# Altium PCB LT3083.PcbDoc
Units mil, origin at the board's own origin, x right, y up, seen from the top; angles counter-clockwise.
Board outline 1898 x 1203 mil, 2 copper layers (Top Layer, Bottom Layer); 28 components, 13 nets, 76 pads, 96 vias.
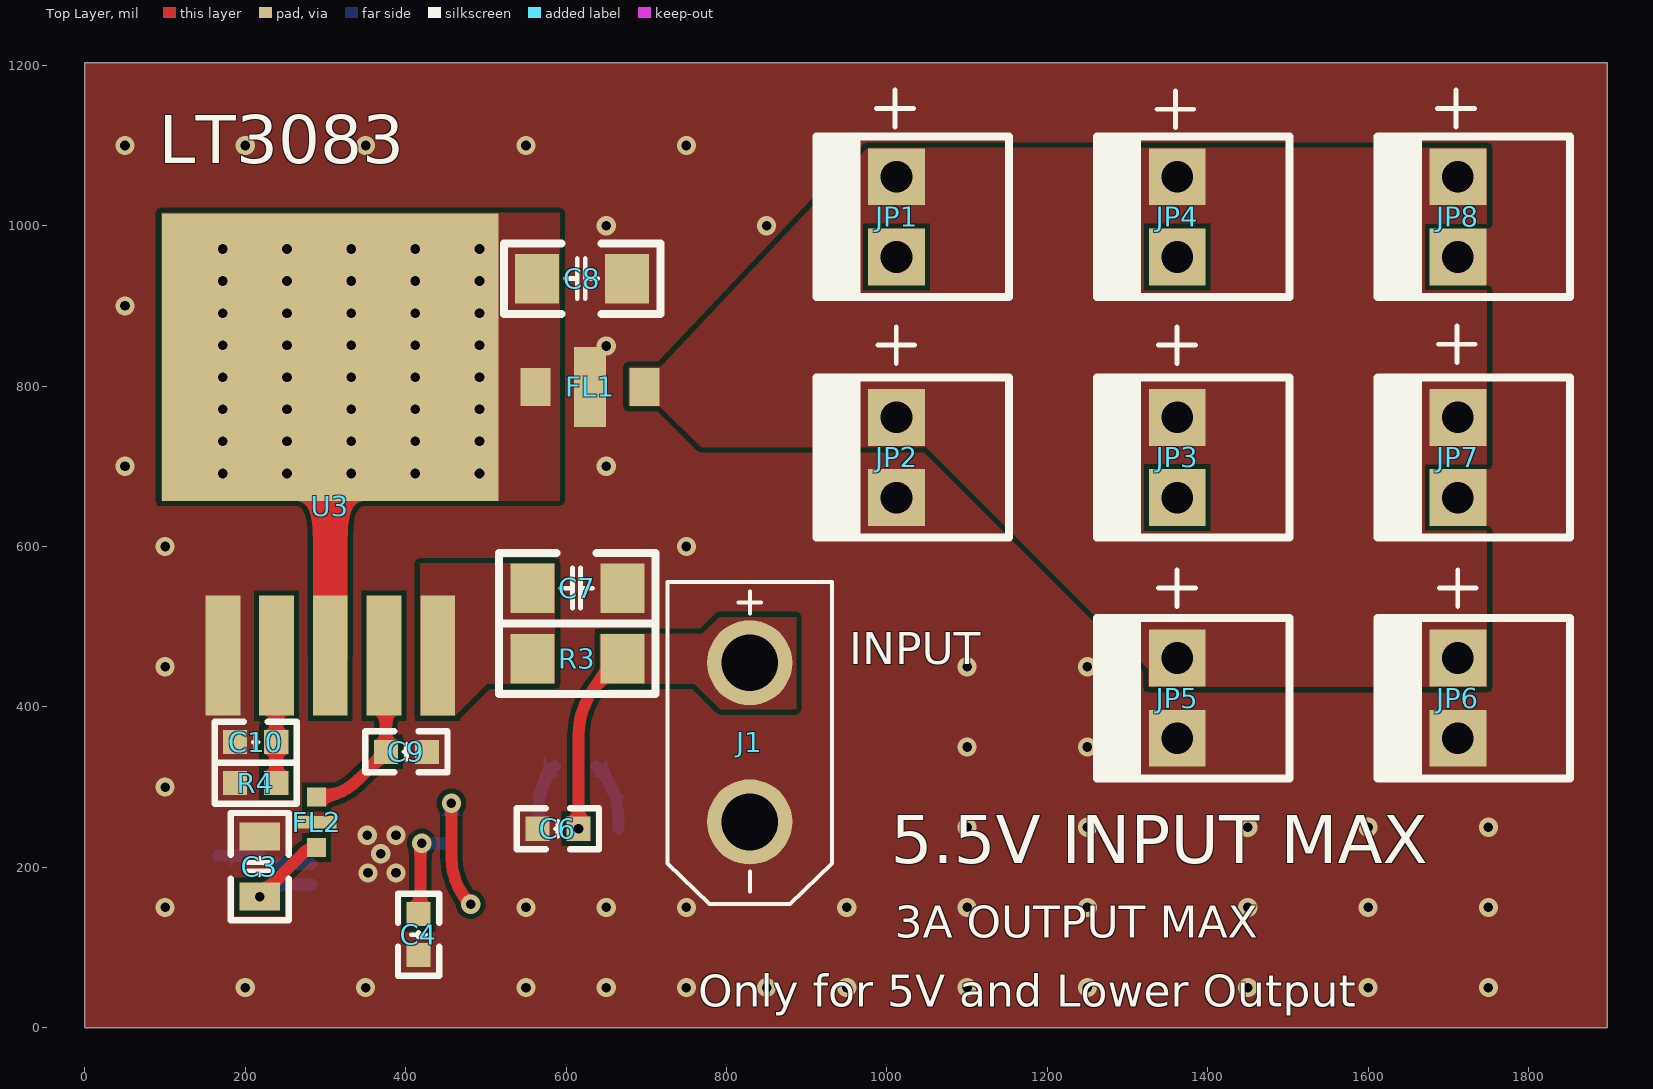
[diagram p0: Top Layer view]
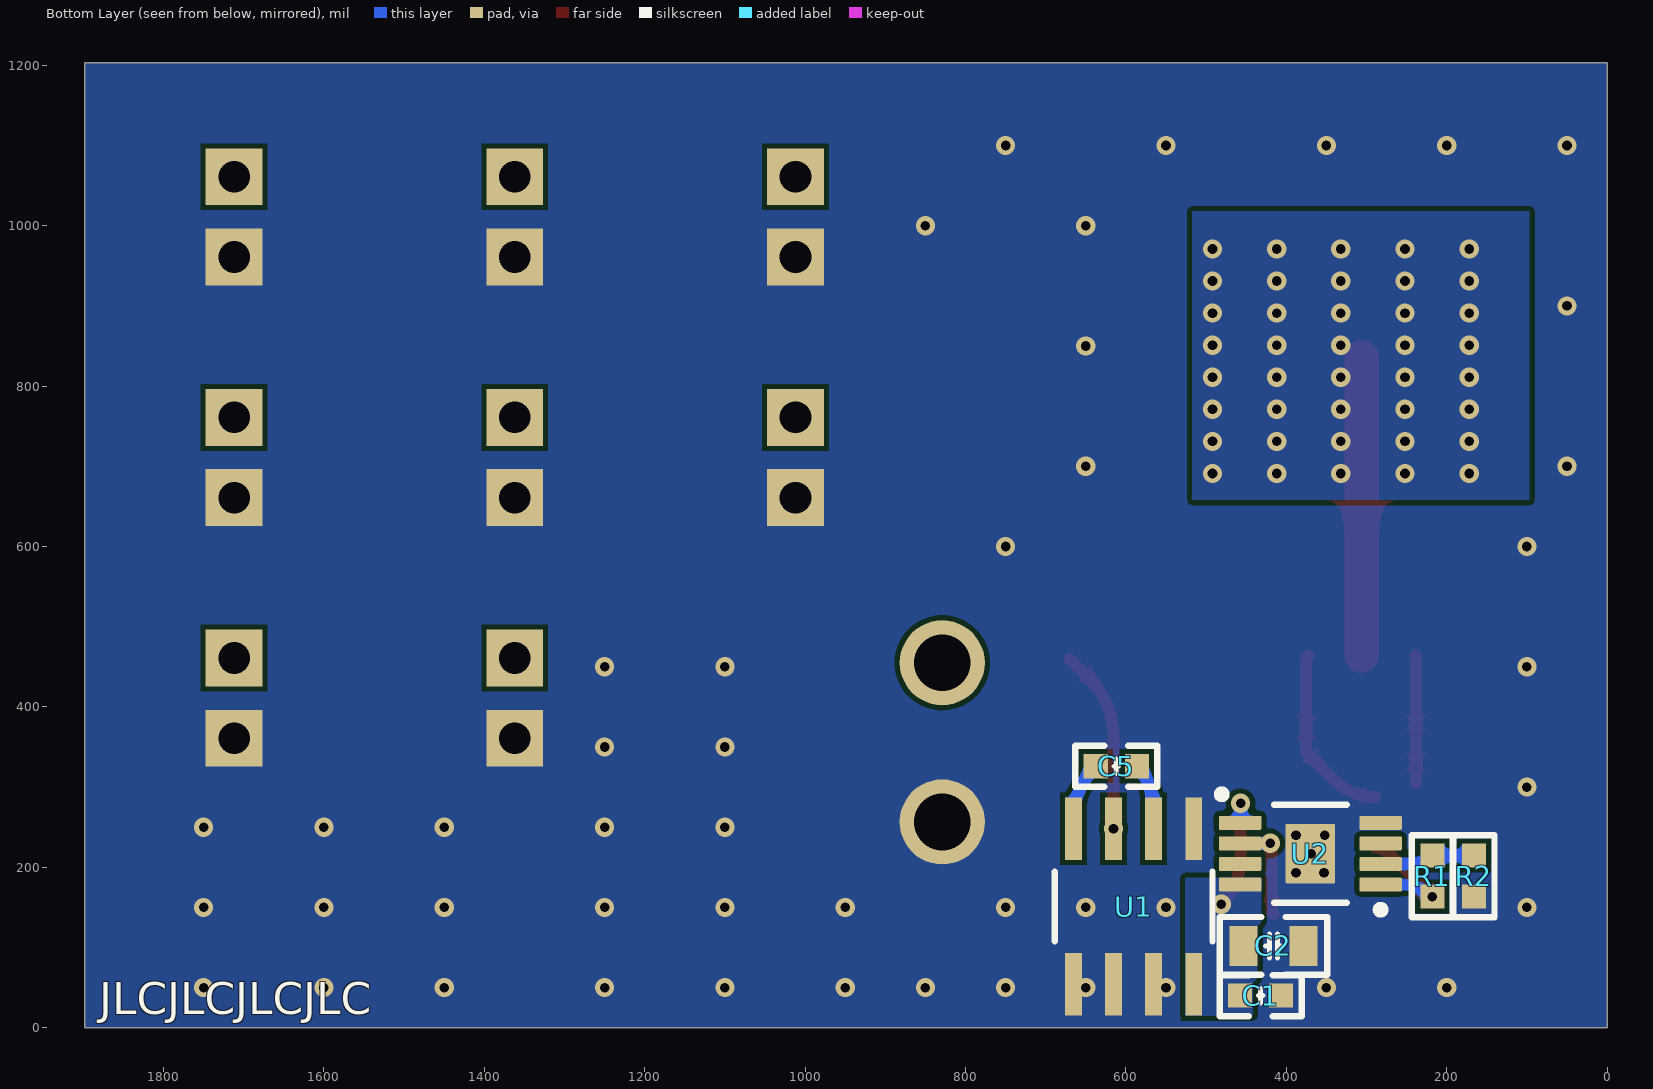
[diagram p1: Bottom Layer view, seen from below]
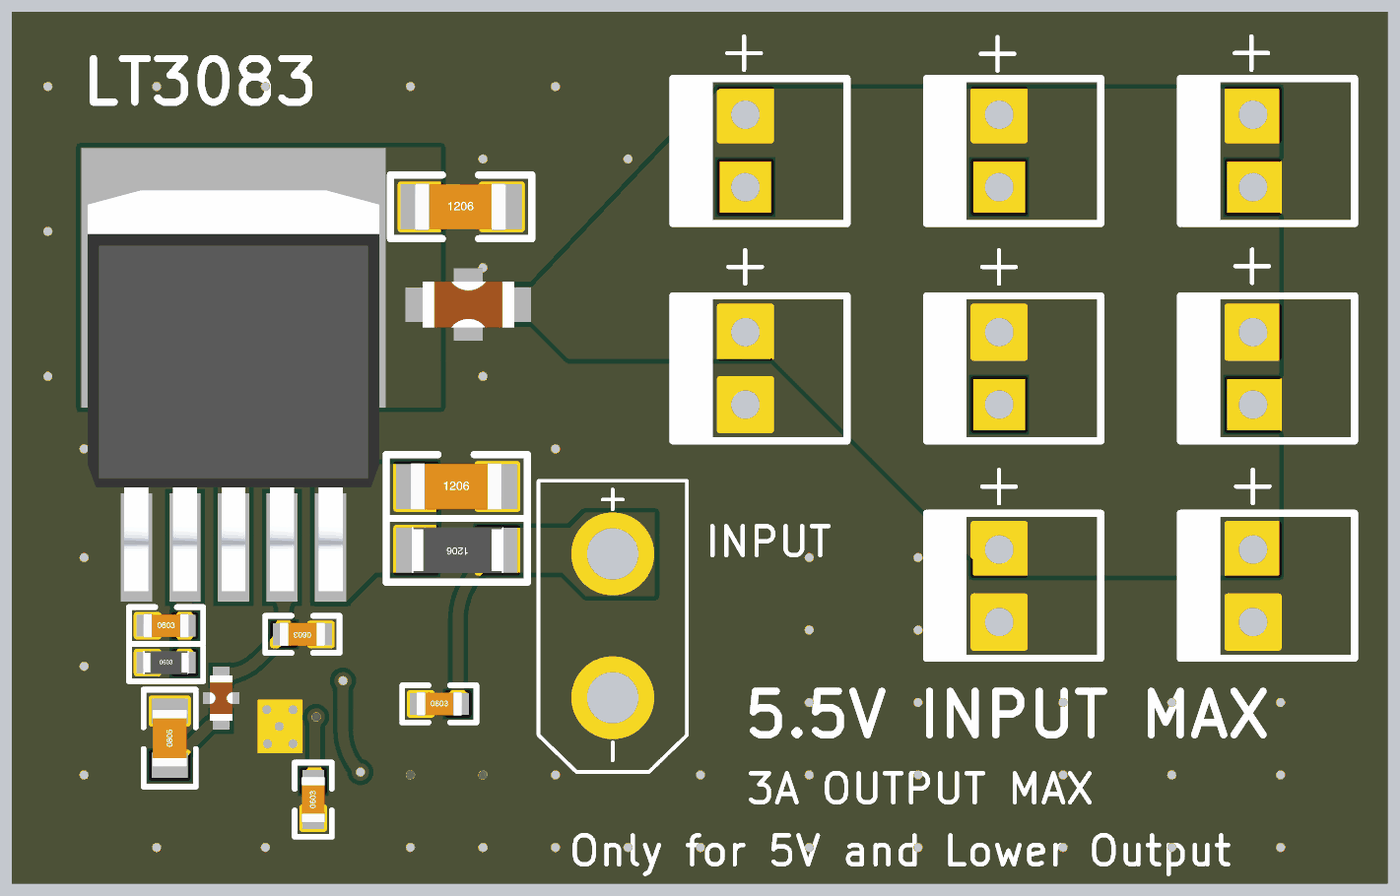
[diagram p2: 3D render of the assembled board from above, using the file's embedded part models]
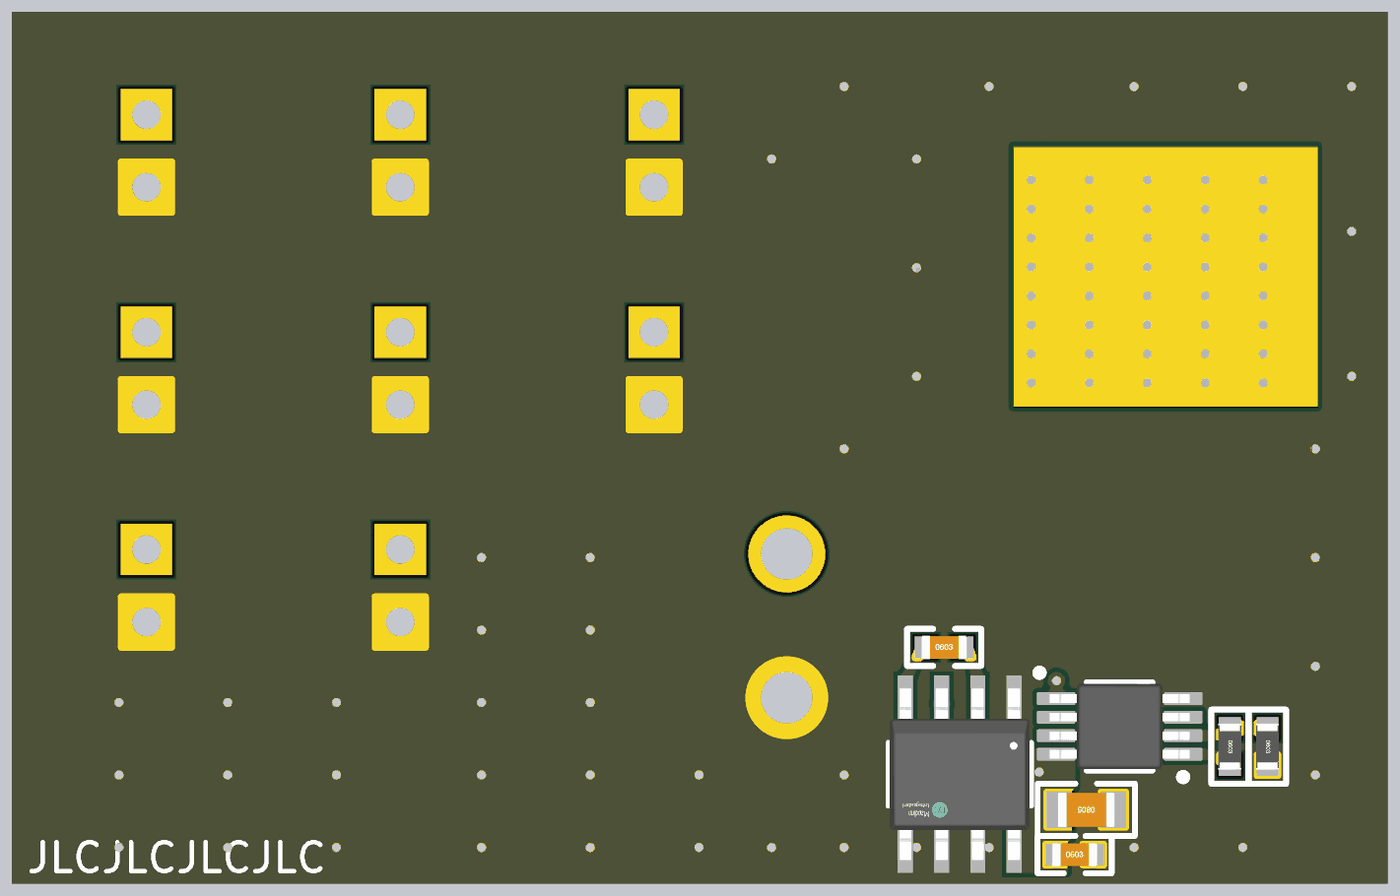
[diagram p3: 3D render of the assembled board from below, using the file's embedded part models]

## Layer stack, top to bottom
Top Solder: solder mask 0.4, Solder Resist, Dk 3.5
Top Layer: signal copper 1.4
Dielectric 1: dielectric 12.6, FR-4, Dk 4.8
Bottom Layer: signal copper 1.4
Bottom Solder: solder mask 0.4, Solder Resist, Dk 3.5

## Board outline
0,0 0,1203 1898,1203 1898,0

## Design rules (kind name [scope] priority, off if disabled: settings)
Clearance [All] p1: gap=6 ignorepadtopadclearanceinfootprint=TRUE
PlaneConnect [All] p1: planeconnectstyle=Direct reliefexpansion=20 reliefentries=4 reliefconductorwidth=10 reliefairgap=10
PolygonConnect [All] p1: connectstyle=Direct reliefconductorwidth=10 reliefentries=4 polygonreliefangle="90 Angle" airgapwidth=10
RoutingVias [All] p1: holewidth=28 width=50 viastyle="Through Hole" minholewidth=28 minwidth=50 maxholewidth=28 maxwidth=50
SolderMaskExpansion [All] p1: expansion=4 istentingtop=FALSE
Width [All] p1: maxlimit=50 minlimit=10 preferedwidth=10
29 further rules are at their usual default settings.

## Components (designator, comment, footprint, x,y, rotation, side; value= is the part's Value field where it differs from the comment)
C1 "2.2uF" "C 0603_L" 432,40 r180 bottom
C2 "10uF" "C 0805_L" 416,102 r0 bottom
C3 "10uF" "C 0805_L" 218,200.82 r90 top
C4 "10nF" "C 0603_L" 416,116 r90 top
C5 "2.2uF" "C 0603_L" 612,326 r180 bottom
C6 "2.2uF" "C 0603_L" 589.89,248.05 r0 top
C7 "22uF" "C 1206_L" 613.01,548.03 r0 top
C8 "22uF" "C 1206_L" 619,934 r0 top
C9 "4.7uF" "C 0603_L" 401,344 r180 top
C10 "100nF" "C 0603_L" 213,356 r0 top
FL1 "NFM31KC104R1H3L" FIL_NFM31KC104R1H3L 630,799 r0 top
FL2 "NFM18PC104R1C3D" FIL_NFM18PC104R1C3D 289,256 r90 top
J1 "XT30UPB-M" XT30UPB-M 829,355 r270 top
JP1 "HDR-1X2" KF2510-LI-2P 1012,1011 r90 top
JP2 "HDR-1X2" KF2510-LI-2P 1012,711 r90 top
JP3 "HDR-1X2" KF2510-LI-2P 1362,711 r90 top
JP4 "HDR-1X2" KF2510-LI-2P 1362,1011 r90 top
JP5 "HDR-1X2" KF2510-LI-2P 1362,411 r90 top
JP6 "HDR-1X2" KF2510-LI-2P 1712,411 r90 top
JP7 "HDR-1X2" KF2510-LI-2P 1712,711 r90 top
JP8 "HDR-1X2" KF2510-LI-2P 1712,1011 r90 top
R1 "47K" "R 0603_L" 218,189 r270 bottom
R2 "10K" "R 0603_L" 166,189 r270 bottom
R3 "50Ω磁珠" "R 1206_L" 615,460 r180 top
R4 "100K" "R 0603_L" 213,305 r0 top
U1 "MAX1681ESA+" FP-S8-5-MFG 590.48,151 r270 bottom
U2 "TPS7A49DGNT" DGN0008D_N 370,217 r0 bottom
U3 "LT3083EQ#PBF" LT-Q-5_N 306,710.06 r90 top

## Footprints (in the part's own frame and the unit in brackets; to place one, negate y for a bottom-side part, rotate by r counter-clockwise, add the part's x,y. Pads: shape width x height; smd on the part's side, far side on the other; paste and mask are expansions set on the pad)
"C 0603_L" [mil] "无极性贴片电容"
  rect 30x30 smd: 1(-25.59,0) 2(25.59,0)
  silkscreen extent -51,-26 51,26, body extent -31,-16 31,16, height 32
"C 0805_L" [mil] "无极性贴片电容"
  rect 35x50 smd: 1(-37.4,0) 2(37.4,0)
  silkscreen extent -67,-36 67,36, body extent -39,-24 39,24, height 20
"C 1206_L" [mil] "无极性贴片电容 https://item.taobao.com/item.htm?ft=t&id=613637044352"
  rect 55x62 smd: 1(-55.12,0) 2(57.09,0)
  silkscreen extent -96,-44 98,44, body extent -63,-32 63,32, height 48
DGN0008D_N [mm] "TSOP, 8-Leads, Body 3.1x3.1mm, Pitch 0.65mm, Thermal Pad 1.89x1.57mm, IPC Medium Density"
  rrect22% 1.35x0.45 smd mask+0: 1(-2.225,0.975) 2(-2.225,0.325) 3(-2.225,-0.325) 4(-2.225,-0.975) 5(2.225,-0.975) 6(2.225,-0.325) 7(2.225,0.325) 8(2.225,0.975)
  rrect6% 1.57x1.89 smd mask+0: 9(0,0)
  silkscreen extent -2.35,-1.55 1.15,1.9, body extent -2.45,-1.5 2.45,1.5, height 0.94
FIL_NFM18PC104R1C3D [mm]
  rect 0.6x0.6 smd mask+0: 1(-0.8,0) 3(0.8,0)
  rect 0.4x1.27 smd mask+0: 2(0,0)
  rect 0.4x1.27 on Top Solder mask+0: ""(0,0)
  body extent -0.8,-0.4 0.8,0.4, height 0.7
FIL_NFM31KC104R1H3L [mm]
  rect 0.95x1.2 smd mask+0: 1(-1.725,0) 3(1.725,0)
  rect 1.016x2.54 smd paste+0 mask+0: 2(0,0)
  body extent -1.6,-0.8 1.6,0.8, height 1.5
FP-S8-5-MFG [mm]
  rect 1.98x0.53 smd paste+0 mask+0: 1(-2.465,1.905) 2(-2.465,0.635) 3(-2.465,-0.635) 4(-2.465,-1.905) 5(2.465,-1.905) 6(2.465,-0.635) 7(2.465,0.635) 8(2.465,1.905)
  silkscreen extent -3.68,-2.5 1.1,2.92, body extent -3.01,-2.45 3.01,2.45, height 1.75
KF2510-LI-2P [mm] "接插件/2A"
  rect 1.8x1.8 hole 1: 1(-1.27,0) 2(1.27,0)
  silkscreen extent -2.59,-3.56 2.54,2.54, body extent -2.54,-3.5 2.54,2.4, height 11.05
LT-Q-5_N [mm] "DPAK, 5-Leads, Body 10.22x8.89mm, Pitch 1.702mm, IPC Medium Density"
  rect 3.81x1.1 smd mask+0: 1(-6.25,3.4) 2(-6.25,1.7) 3(-6.25,0) 4(-6.25,-1.7) 5(-6.25,-3.4)
  rect 9.1x10.65 smd mask+0: 6(3.2,0)
  body extent -7.79,-5.11 6.26,5.11, height 4.57
"R 0603_L" [mil] "1/10W贴片电阻 https://item.taobao.com/item.htm?ft=t&id=613637044352"
  rect 30x30 smd: 1(-25.59,0) 2(25.59,0)
  silkscreen extent -51,-26 51,26, body extent -31,-16 31,16, height 16
"R 1206_L" [mil] "1/4W贴片电阻"
  rect 55x62 smd: 1(-55.12,0) 2(57.09,0)
  silkscreen extent -96,-44 98,44, body extent -63,-31 63,32, height 22
XT30UPB-M [mm]
  round 2.698 hole 1.8: 1(-2.54,0) 2(2.5,0)
  silkscreen extent -5.1,-2.6 5.1,2.6

## Part data
C1 C2 C3 C4 C5 C6 C7 C8 C9 C10: library part C, "贴片电容", BOM名称=贴片电容, 下单链接=https://item.taobao.com/item.htm?ft=t&id=613637044352, 淘宝ID=小糖豆的小窝窝
FL1: "SMD Capacitor with Capacitance: 0.10uF Tol. 20%. Rated Voltage: 50Vdc", Package=NONSTANDARD, Availability=Unavailable, MF=Murata, MP=NFM31KC104R1H3L, Price=None, SnapEDA_Link=https://www.snapeda.com/parts/NFM31KC104R1H3L/Murata/view-part/4377127/?ref=snap
FL2: "SMD Capacitor with Capacitance: 0.10uF Tol. 20%. Rated Voltage: 16Vdc", Package=NONSTANDARD, Digi-Key_Part_Number=490-6969-1-ND, Digi-Key_Purchase_URL=https://www.digikey.com/product-detail/en/murata-electronics/NFM18PC104R1C3D/490-6969-1-ND/3846166?utm_source=snapeda&utm_medium=aggregator&utm_campaign=symbol, MF=Murata, MP=NFM18PC104R1C3D, SnapEDA_Link=https://www.snapeda.com/parts/NFM18PC104R1C3D/Murata/view-part/4375738/?ref=snap
J1: "Socket; DC supply; XT30; male; PIN: 2; on PCBs; THT; yellow; 15A; 500V", Package=None, Availability="Not in stock", MF=amass, MP=XT30UPB-M, Price=None
JP1 JP2 JP3 JP4 JP5 JP6 JP7 JP8: library part "Header 2", "2P接插件", BOM名称=2P接插件, 下单链接=https://item.taobao.com/item.htm?ft=t&id=613637044352, 淘宝ID=小糖豆的小窝窝
R1 R2 R3 R4: library part R, "贴片电阻", BOM名称=贴片电阻, 下单链接=https://item.taobao.com/item.htm?ft=t&id=613637044352, 淘宝ID=小糖豆的小窝窝
U1: library part MAX1681ESA, "IC REG CHARGE PUMP INV 8SOIC", Manufacturer=Maxim, Max Junction Temp=+150°C, Max Power Dissipation=471mW, Max Supply Voltage=5.5V, Min Supply Voltage=3V, Negative Voltage Available=true, Nominal Supply Current=10-20mA, Output Current=125mA, Output Voltage=-5.5/+11V, Package=S8-5, Switching Frequency=500/1000kHz, Temperature="-40°C to +85°C", Temperature Range High=+85°C, Temperature Range Low=-40°C, Automotive=No, Category=IC, ComponentLink2Description=Datasheet, ComponentLink2URL=https://datasheets.maximintegrated.com/en/ds/MAX1680-MAX1681.pdf, Device Class L1="Integrated Circuits (ICs)", Device Class L2="Power Management ICs", Device Class L3="Voltage Regulators - Switching", Digikey Description="IC REG CHARGE PUMP INV 8SOIC", Footprint Url=https://pdfserv.maximintegrated.com/land_patterns/90-0096.PDF, Height=1.75mm, Lead Free=Yes, Manufacturer Part Number=MAX1681ESA+, Mouser Description="Switching Voltage Regulators 125mA f-Select Swtcd Voltage Converter", Number Of Outputs=1, Octopart=https://octopart.com/max1681esa%2B-maxim+integrated-39580721, Output Type=Other, RoHS=TRUE, Standoff Height=0.1mm, Switching Topology="Charge Pump"
U2: library part TPS7A49, "Single Output High PSRR LDO, 150 mA, Adjustable 1.2 to 33 V Output, 3 to 36 V Input, with Ultra-Low Noise, 8-pin MSOP (DGN), -40 to 125 degC, Green (RoHS & no Sb/Br)", Manufacturer="Texas Instruments", PartNumber=TPS7A4901DGNT, Power Good=TRUE, Accuracy(%)=1.5, Code_JEDEC=MO-187, ComponentLink1Description="Manufacturer URL", ComponentLink1URL=http://www.ti.com/, ComponentLink2Description=Datasheet, ComponentLink2URL=http://www.ti.com/general/docs/lit/getliterature.tsp?genericPartNumber=TPS7A4901&fileType=pdf, ComponentLink3Description="Package Specification", ComponentLink3URL=http://www.ti.com/litv/pdf/mpds046e, DatasheetVersion=SBVS121B, Eco-Plan="Green (RoHS & no Sb/Br)", Iout(Max)(A)=0.15, Iq(Typ)(mA)=0.06, Mounting Technology="Surface Mount", PackageDescription="8-pin Plastic Small Outline, Body 3 x 3 mm, Pitch 0.65 mm", PackageReference=DGN0008D, PackageVersion=4073271/F, SubFamily="Single Channel LDO", Vdo(Typ)(mV)=260, Vin(Max)(V)=36, Vin(Min)(V)=3, Vout Adj(Max)(V)=33, Vout Adj(Min)(V)=1.2
U3: library part LT3083EQ, "3 A Single Resistor Low Dropout Regulator, 1.2 to 23 V Vin, Adjustable Vout, 5-pin DPAK (Q-5), -40 to 125 degC, Pb-Free", Dropout Voltage(V)=0.31, Manufacturer="Linear Technology", Output Voltage=Adj, Shutdown Current(uA)=0, ComponentLink1Description="Manufacturer URL", ComponentLink1URL=http://www.linear.com/, ComponentLink2Description=Datasheet, ComponentLink2URL=http://cds.linear.com/docs/en/datasheet/3083fa.pdf, ComponentLink3Description="Package Specification", ComponentLink3URL=http://cds.linear.com/docs/en/packaging/Q%20DD5%2005-08-1461%20Rev%20F.pdf, DatasheetVersion="Rev. A", Discrete Pass Element=no, Iout(mA)=3000, Isupply(mA)=0.35, Mounting Technology="Surface Mount", Noise(uV)=40, Number Of Outputs=1, PackageDescription="5-Pin Plastic DD Pak, Body 10.2235 x 8.89 mm, Pitch 1.702 mm", PackageReference=Q-5, PackageVersion="Rev. F, 09/2011", PartNumber=LT3083EQ#PBF, PSRR(dB)=85, RoHS=TRUE, Vin Max(V)=23, Vin Min(V)=1.2, Vout Max(V)=23, Vout Min(V)=0

## Via types
v1: diameter 24, hole 12, Top Layer to Bottom Layer, tented both sides, 96 vias

## Nets (pads, with @x,y where several pads share a name; then routed paths per layer and width w, separated by ;. In a path a pad name is that pad's centre, name@x,y a point inside that pad or via, vN(x,y) a via of type N, cw(c..) or ccw(c..) an arc to the next point about the centre after c; other vN are vias at no path point)
+5: FL1.3 JP1.2 JP2.2 JP3.2 JP4.2 JP5.2 JP6.2 JP7.2 JP8.2
CPOUT: C1.1 C2.2 U1.8 U2.5 U2.8 | length 157.2
  Top Layer w15: v1(457,280) 457,211.94 ccw(c538.94,211.94) v1(481,154)
  Bottom Layer w15: v1(457,280) 457,256.83 ccw(c459.04,256.83) U2.5
GND: C1.2 C2.1 C3.2 C4.1 C6.1 C7.2 C8.2 C9.1 C10.1 FL1.2 FL2.2 J1.2 JP1.1 JP2.1 JP3.1 JP4.1 JP5.1 JP6.1 JP7.1 JP8.1 R2.2 R4.1 U1.1 U1.5 U1.6 U1.7 U2.4 U2.9 U3.1
  other v1: 200,50 350,50 550,50 650,50 750,50 850,50 950,50 1100,50 1250,50 1450,50 1600,50 1750,50 100,150 550,150 650,150 750,150 950,150 1100,150 1250,150 1450,150 1600,150 1750,150 353,193 388,193 369,217 352,240 388,240 1100,250 1250,250 1450,250 1600,250 1750,250 100,300 1100,350 1250,350 100,450 1100,450 1250,450 100,600 750,600 50,700 650,700 650,850 50,900 650,1000 850,1000 50,1100 200,1100 350,1100 550,1100 750,1100
IN: C6.2 J1.1 R3.1 U1.3 | length 230.3
  Top Layer w15: v1(615.48,248.05) 615.48,363.94 cw(c715.48,363.94) 644.77,434.65 R3.1
NetC4_2: C4.2 U2.6 | length 127.8
  Top Layer w15: C4.2 418.28,143.86 418.28,228.28 v1(420,230)
  Bottom Layer w15: v1(420,230) 420.1,229.9 457.5,229.9 U2.6
NetC5_1: C5.1 U1.4 | length 85.4
  Bottom Layer w15: C5.1 cw(c570.27,258.67) 665.48,258.67 U1.4
NetC5_2: C5.2 U1.2 | length 83.5
  Bottom Layer w15: U1.2 565.48,275.46 cw(c636.95,275.46) C5.2
NetC7_1: C7.1 R3.2 U3.5
NetC8_1: C8.1 FL1.1 U3.3 U3.6 | length 372
  Top Layer w43.31: U3.3 U3.6
  other v1: 172,691 252,691 332,691 412,691 492,691 172,731 252,731 332,731 412,731 492,731 172,771 252,771 332,771 412,771 492,771 172,811 252,811 332,811 412,811 492,811 172,851 252,851 332,851 412,851 492,851 172,891 252,891 332,891 412,891 492,891 172,931 252,931 332,931 412,931 492,931 172,971 252,971 332,971 412,971 492,971
NetC9_2: C9.2 FL2.3 U3.4 | length 227.4
  Top Layer w15: FL2.3 ccw(c289,359.69) 340.05,308.64 C9.2 375.41,458 ccw(c366.93,458) U3.4
NetC10_2: C10.2 R4.2 U3.2 | length 159.1
  Top Layer w15: R4.2 C10.2 238.59,462.83 cw(c240.24,462.83) U3.2
NetR1_1: R1.1 R2.1 U2.2 | length 119.2
  Bottom Layer w15: R2.1 R1.1 ccw(c243.08,239.67) 243.08,204.2 U2.2
VCTRL: C3.1 FL2.1 R1.2 U2.1 | length 182.5
  Top Layer w15: C3.1@234.91,170.42 cw(c218,187.33) v1(218,163.41) 272.09,217.5 cw(c289,200.59) FL2.1
  Bottom Layer w15: v1(218,163.41) cw(c254.7,126.71) 254.7,178.61 U2.1
pads on no net: FL2. U2.3 U2.7

## Polygon pours and split planes (outlines as drawn)
GND on Top Layer "NONET_L-01_P-001" (solid, remove dead copper, pour order 6): 0,1203 1898,1203 1898,0 0,0
+5 on Top Layer "NONET_L-01_P-001" (solid, remove dead copper, pour order 5): 678,824 718,824 976,1097 1748,1097 1748,425 1326,425 1326,447 1048,725 1047,724 768,724 717,775 678,775
NetC8_1 on Top Layer "NONET_L-01_P-001" (solid, remove dead copper, pour order 3): 95,1016 592,1016 592,657 95,657
NetC7_1 on Top Layer "NONET_L-01_P-001" (solid, remove dead copper, pour order 1): 418,579 586,579 586,429 502,429 462,389 418,389
IN on Top Layer "NONET_L-01_P-001" (solid, remove dead copper, pour order 0): 642,429 760,429 792,397 887,397 887,512 791,512 770,491 642,491
GND on Bottom Layer "NONET_L-01_P-001" (solid, remove dead copper, pour order 7): 0,1203 1898,1203 1898,0 0,0
NetC8_1 on Bottom Layer "NONET_L-01_P-001" (solid, pour order 4): 97,1018 517,1018 517,658 97,658
CPOUT on Bottom Layer "NONET_L-01_P-001" (solid, remove dead copper, pour order 2): 431,187 431,132 436,127 436,62 442,56 442,15 526,15 526,187
no net on Top Solder "NONET_L-01_P-001" (solid): 339,254 339,180 401,180 401,254
no net on Bottom Solder "NONET_L-01_P-001" (solid): 96,1016 516,1016 516,656 96,656

## Silkscreen, mask and mechanical layers (free items; w line width, h text height)
Top Overlay:
  lines w6: 987,1146 1033,1146 ; 988.67,851.08 1034.67,851.08 ; 1010,1123 1010,1169 ; 1011.67,828.08 1011.67,874.08 ; 1336.67,1145.08 1382.67,1145.08 ; 1338.67,548.08 1384.67,548.08 ; 1338.67,851.08 1384.67,851.08 ; 1359.67,1122.08 1359.67,1168.08 ; 1361.67,525.08 1361.67,571.08 ; 1361.67,828.08 1361.67,874.08 ; 1686.67,1146.08 1732.67,1146.08 ; 1687.67,852.08 1733.67,852.08 ; 1688.67,548.08 1734.67,548.08 ; 1709.67,1123.08 1709.67,1169.08 ; 1710.67,829.08 1710.67,875.08 ; 1711.67,525.08 1711.67,571.08
  text "LT3083" at 92,1078 h60
  text "INPUT" at 953,453 h40
  text "5.5V INPUT MAX" at 1005,205 h60
  text "3A OUTPUT MAX" at 1010,112 h40
  text "Only for 5V and Lower Output" at 765,26.33 h40
Bottom Overlay:
  text "JLCJLCJLCJLC" at 1880,17 h40
Mechanical 1:
  the board outline again, w6